# EAGLE board nonregulation-level-shifter-mk-2.3 (EAGLE 7.5.0)
VERSION: v2.3
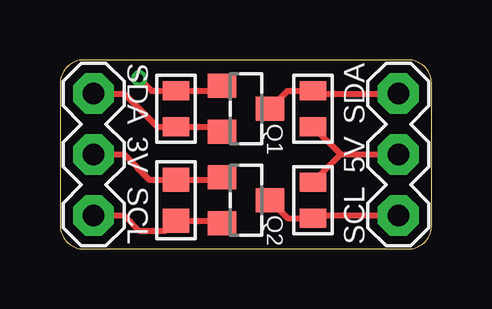
[diagram p0: board, top side]
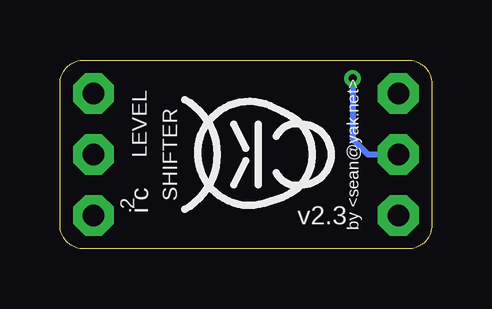
[diagram p1: board, bottom side, seen from below]

Size 15.49 x 7.87 mm. Coordinates in mm from the lower left corner, seen from the top.
Outline: 1,0 14.49,0 arc90 15.49,1 15.49,6.87 arc90 14.49,7.87 1,7.87 arc90 0,6.87 0,1 arc90 1,0
Copper layers (1*16): Top 0.0356mm / dielectric 1.5011mm / Bottom 0.0356mm
Design rules "LaenPCBOrder_2": minimum track width 6mil, minimum drill 13mil, track to track 6mil, track to pad 6mil, pad to pad 6mil, via to via 6mil, smd to smd 6mil, copper to edge 15mil, drill to drill 6mil, minimum pad ring 7mil, minimum via ring 7mil, stop-mask expansion 3mil, vias tented up to drill 20mil, thermal gap 10mil

## Footprints (pad centres in the part's own frame; a part is rotated, then mirrored left to right if it is on the bottom)
1X03-CENTERED = drill 0.9 pad 1.7 octagon: 1 -2.54,0; 2 0,0; 3 2.54,0
SOT23 = smd 1 x 1.2: 1 -0.95,-1; 2 0.95,-1; 3 0,1
R0603-TIGHTER = smd 0.8 x 1.1: 1 -0.75,0; 2 0.75,0
R0603 = smd 1 x 1.1: 1 -0.85,0; 2 0.85,0

## Placement (x,y rotation side)
FRAME1  FRAME-LETTERNO_PACKAGE  [DUMMY]  0.13,0.13 0 top
HV  M03PTH-CENTERED  [1X03-CENTERED]  14.1,3.94 90 top
LV  M03PTH-CENTERED  [1X03-CENTERED]  1.4,3.94 90 top
Q1  IRLML2502  [SOT23]  7.75,5.84 270 top
Q2  IRLML2502  [SOT23]  7.75,2.03 270 top
R1  4K7  [R0603-TIGHTER]  4.83,5.84 90 top
R2  4K7  [R0603-TIGHTER]  10.54,5.84 270 top
R3  4K7  [R0603]  4.83,2.03 90 top
R4  4K7  [R0603-TIGHTER]  10.54,2.03 90 top
U$1  [COW_SMALL_NOTEXT]  7.75,3.94 90 bottom

## Library data of the parts
FRAME1 = A_butts; DESIGNER: sean@yak.net; VERSION: v2.3
HV LV Q1 Q2 R1-R4 U$1 = a_parts

## Nets
3.3V: LV.2 Q1.1 Q2.1 R1.2 R3.2
5V: HV.2 R2.2 R4.2
SCL_3V3: LV.1 Q2.2 R3.1
SCL_5V: HV.1 Q2.3 R4.1
SDA_3V3: LV.3 Q1.2 R1.1
SDA_5V: HV.3 Q1.3 R2.1

## Tracks (layer width: path | path; a pad name or v marks a point on that pad's centre or on a via)
3.3V  (via drill 0.33)
  Top 0.254: LV.2 2.67,3.94 3.72,2.88 R3.2 6.65,2.88 Q2.1 | v3.3,7.11 3.82,6.59 R1.2 6.55,6.59 Q1.1
  Bottom 0.254: v3.3,7.11 3.3,4.57 2.67,3.94 LV.2
5V
  Top 0.254: R2.2 11.7,3.94 | R4.2 11.7,3.94 | 11.7,3.94 HV.2
SCL_3V3
  Top 0.254: Q2.2 6.65,1.18 R3.1 4.41,0.76 3.3,0.76 2.67,1.4 LV.1
SCL_5V
  Top 0.254: Q2.3 9.5,1.28 R4.1 10.66,1.4 HV.1
SDA_3V3
  Top 0.254: LV.3 2.67,6.48 4.05,5.09 R1.1 6.55,5.09 Q1.2
SDA_5V
  Top 0.254: Q1.3 9.5,6.59 R2.1 10.66,6.48 HV.3

## Text on the board
tPlace: SDA | SDA | 3V | 5V | SCL | SCL
bPlace: LEVEL | by <sean@yak.net> | SHIFTER | i c | 2